# Altium PCB PassStat.PcbDoc
Units mil, origin at the board's own origin, x right, y up, seen from the top; angles counter-clockwise.
Board outline 2750 x 3300 mil, 2 copper layers (Top Layer, Bottom Layer); 68 components, 82 nets, 317 pads, 205 vias.
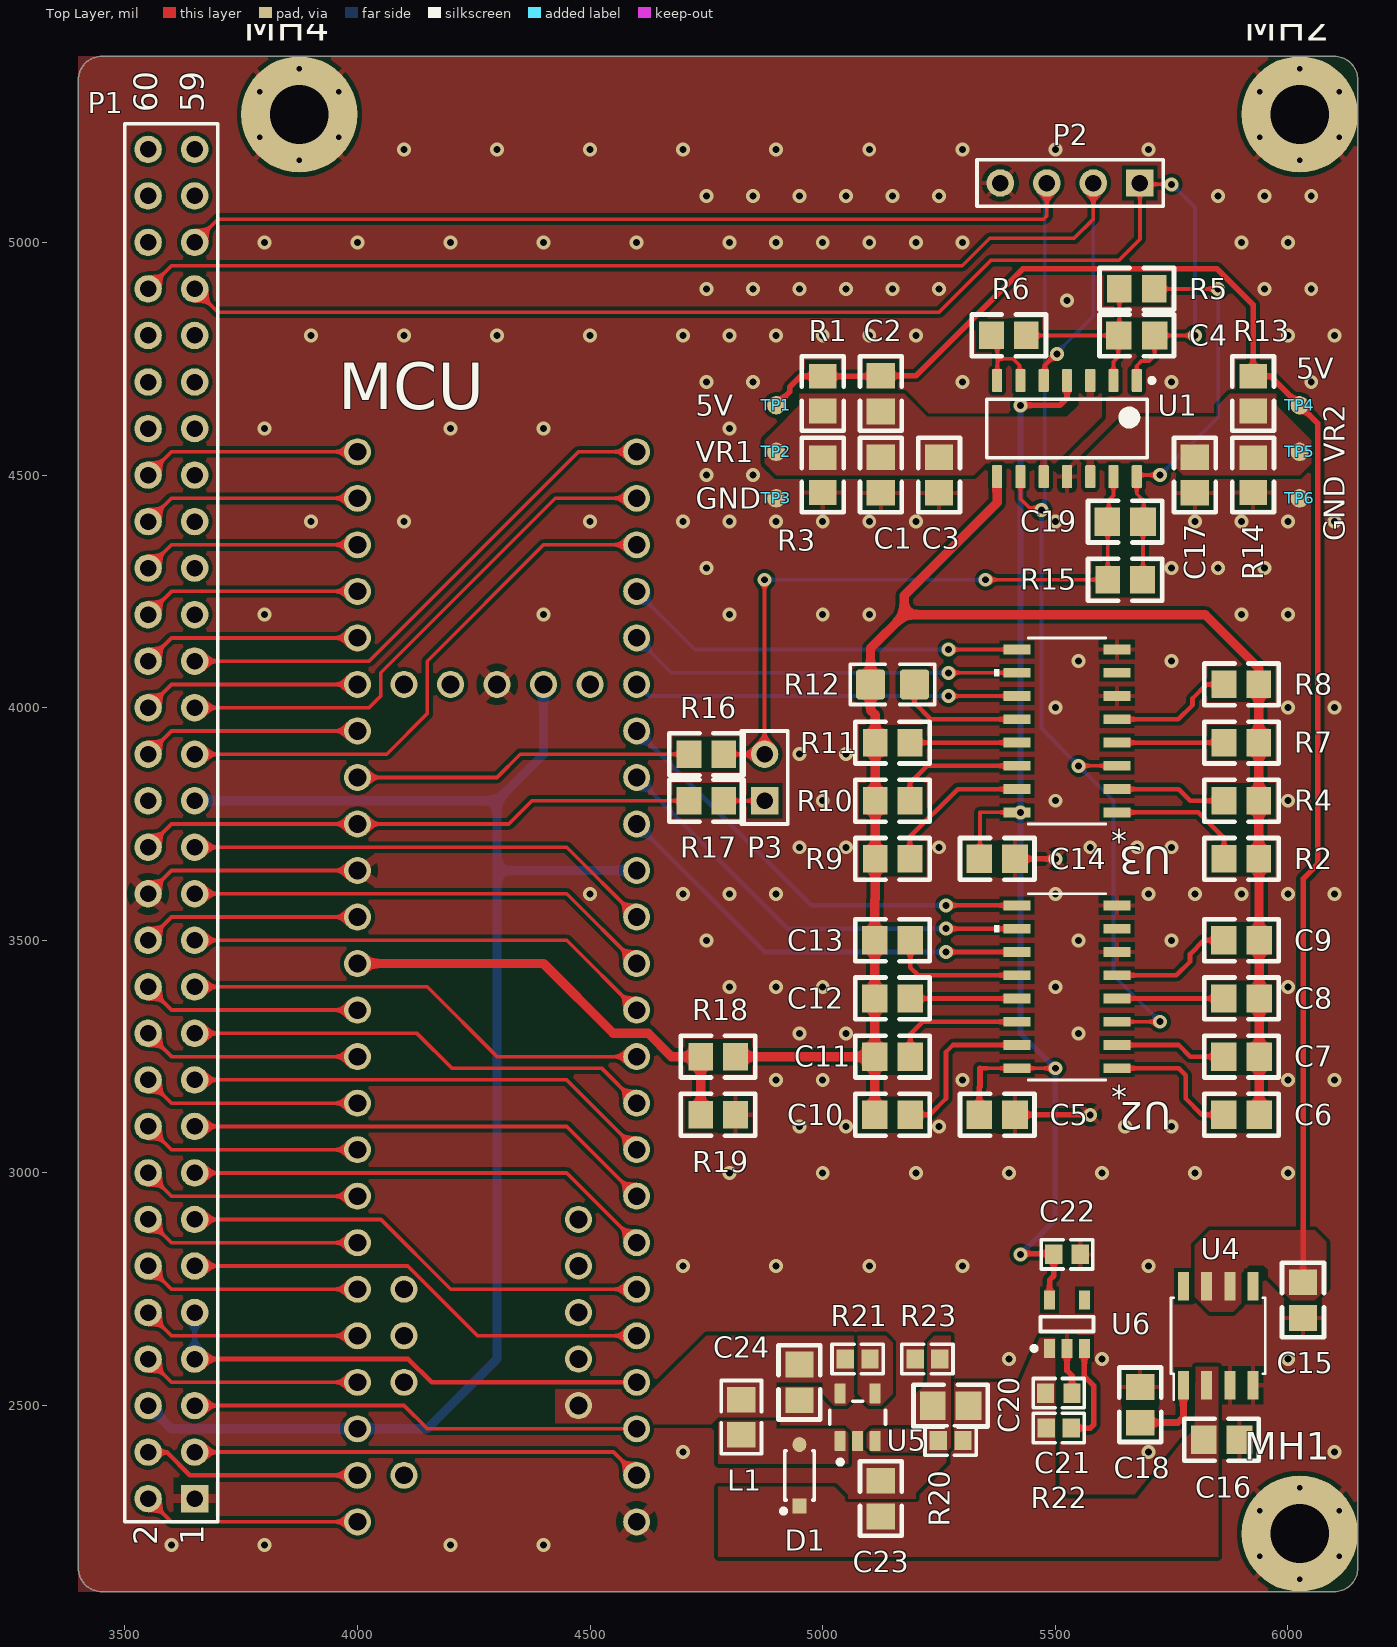
[diagram p0: Top Layer view]
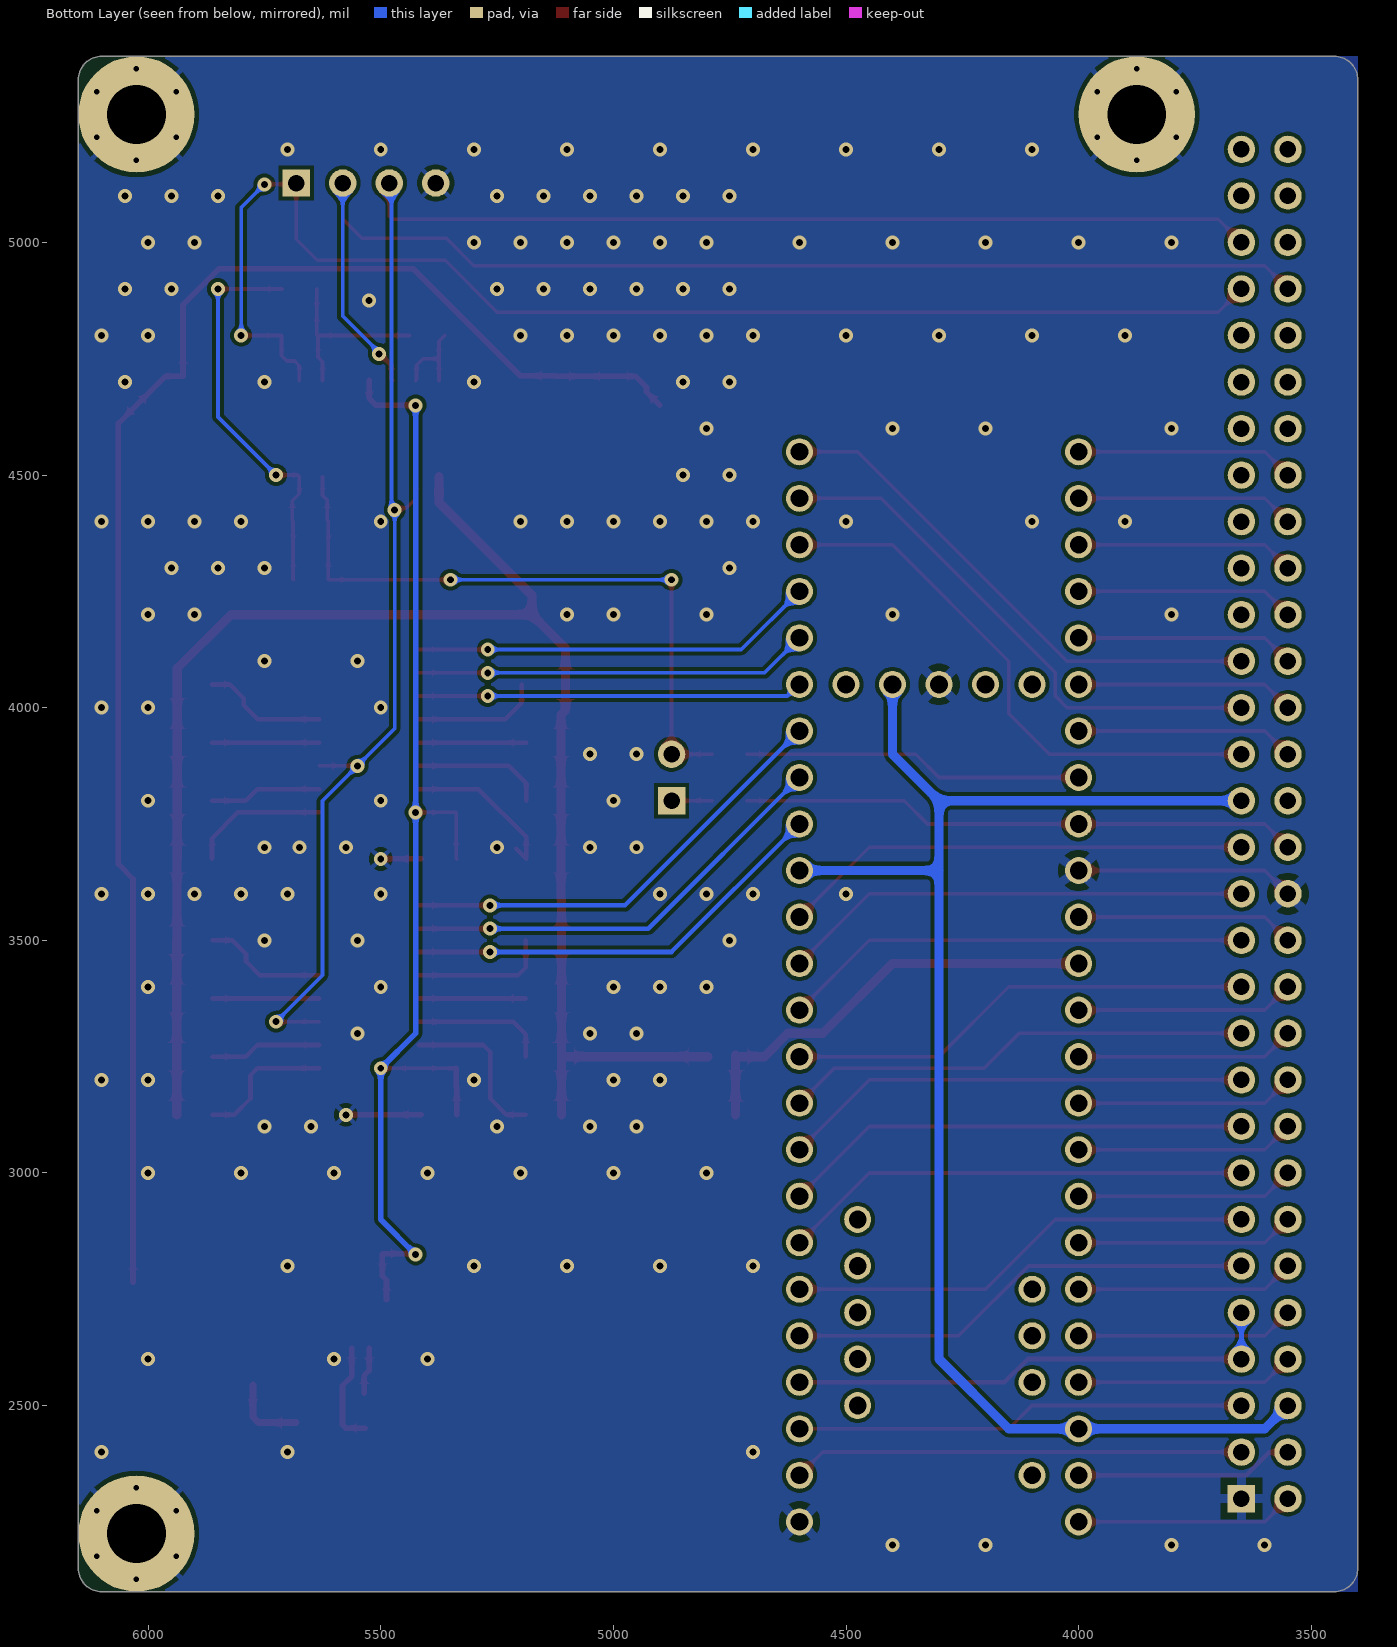
[diagram p1: Bottom Layer view, seen from below]
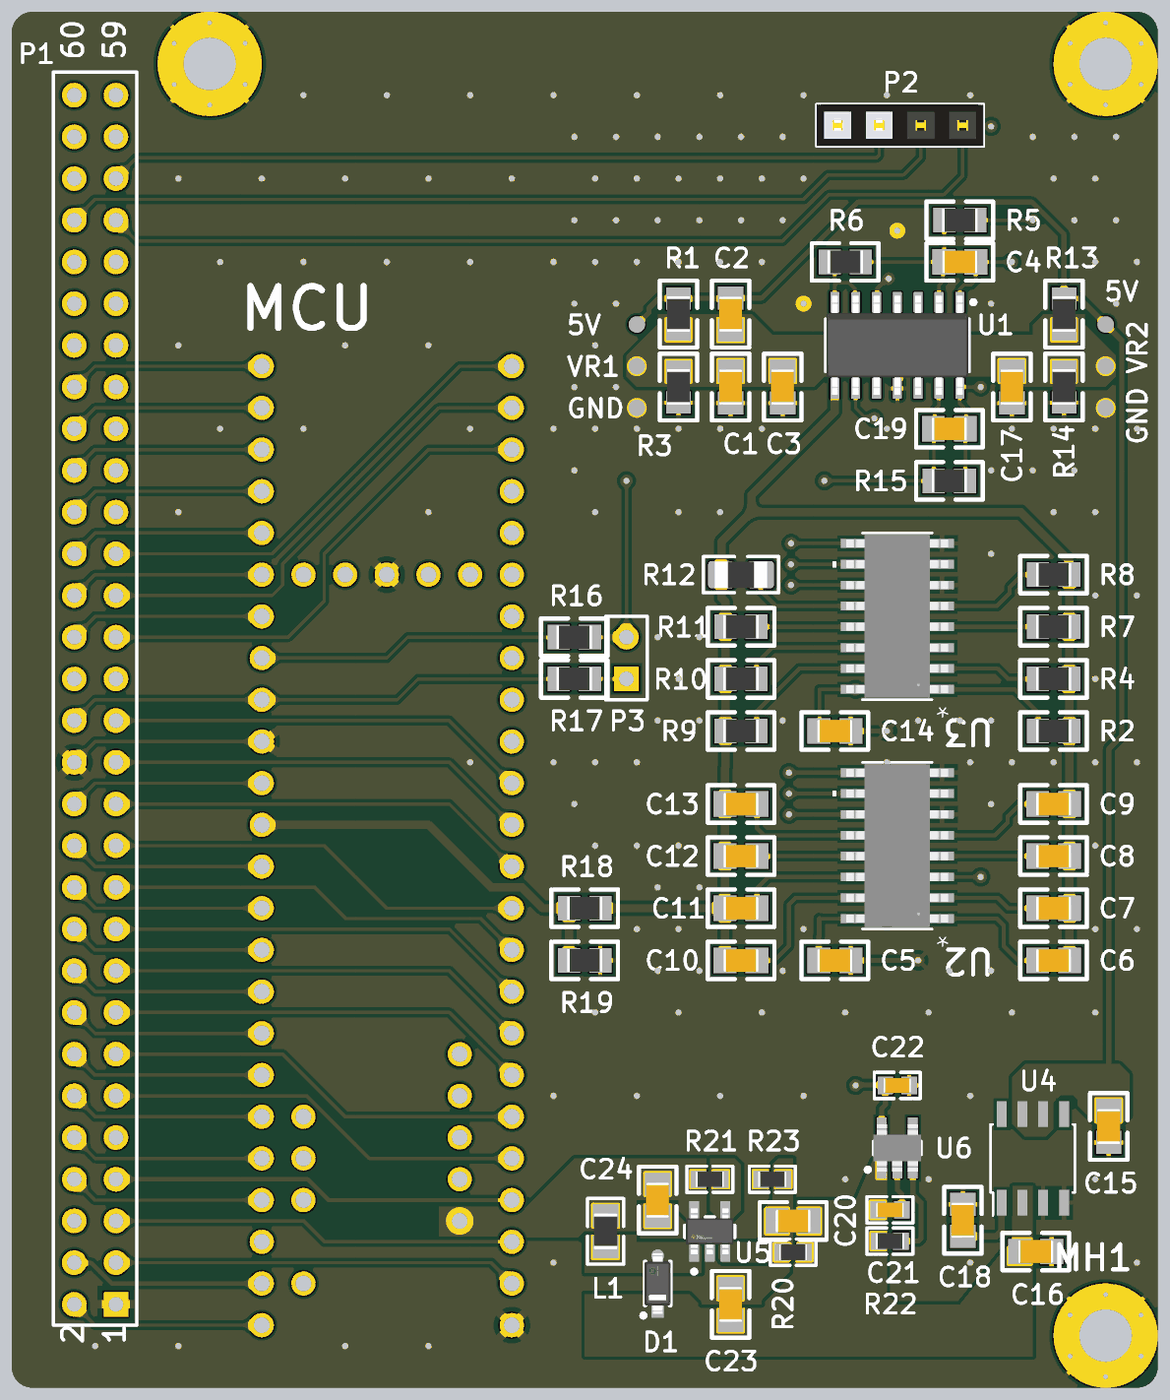
[diagram p2: 3D render of the assembled board from above, using the file's embedded part models]

## Layer stack, top to bottom
Top Solder: solder mask 0.4, Solder Resist, Dk 3.5
Top Layer: signal copper 1.4
Dielectric 1: dielectric 12.6, FR-4, Dk 4.8
Bottom Layer: signal copper 1.4
Bottom Solder: solder mask 0.4, Solder Resist, Dk 3.5

## Board outline
3400,2150 ccw(c3450,2150) 3450,2100 6100,2100 ccw(c6100,2150) 6150,2150 6150,5350 ccw(c6100,5350) 6100,5400 3450,5400 ccw(c3450,5350) 3400,5350

## Design rules (kind name [scope] priority, off if disabled: settings)
Clearance [All] p1: gap=8 ignorepadtopadclearanceinfootprint=FALSE
HoleSize [All] p1: absolutevalues=TRUE maxlimit=100 minlimit=6 maxpercent=80.000 minpercent=20.000
PolygonConnect [All] p1: connectstyle=Relief reliefconductorwidth=10 reliefentries=4 polygonreliefangle="90 Angle" conductorbypadedge=TRUE mindistance=15 enablemindistance=FALSE airgapwidth=10
RoutingVias [All] p1: holewidth=15 width=30 viastyle="Through Hole" minholewidth=10 minwidth=20 maxholewidth=28 maxwidth=50
SMDEntry [All] p1: side=TRUE corner=TRUE anyangle=FALSE
SolderMaskExpansion [All] p1: expansion=4 istentingtop=FALSE
Width [All] p1: maxlimit=250 minlimit=6 preferedwidth=8
29 further rules are at their usual default settings.

## Components (designator, comment, footprint, x,y, rotation, side; value= is the part's Value field where it differs from the comment)
C1 "Capacitor" C0805A 5125,4500 r90 top value=47uF
C2 "Capacitor" C0805A 5125,4675 r90 top value=1u
C3 "Capacitor" C0805A 5250,4500 r90 top value=1u
C4 "Capacitor" C0805A 5675,4800 r0 top value=100p
C5 "Capacitor" C0805A 5375,3125 r180 top value=100n
C6 "Capacitor" C0805A 5900,3125 r0 top value=100n
C7 "Capacitor" C0805A 5900,3250 r0 top value=50n
C8 "Capacitor" C0805A 5900,3375 r0 top value=1n
C9 "Capacitor" C0805A 5900,3500 r0 top value=200p
C10 "Capacitor" C0805A 5150,3125 r180 top value=100p
C11 "Capacitor" C0805A 5150,3250 r180 top value=50p
C12 "Capacitor" C0805A 5150,3375 r180 top value=20p
C13 "Capacitor" C0805A 5150,3500 r180 top value=2p
C14 "Capacitor" C0805A 5375,3675 r180 top value=100n
C15 "Capacitor" C0805A 6032.26,2726.66 r90 top value=1u
C16 "Capacitor" C0805A 5857.26,2426.66 r180 top value=4.7u
C17 "Capacitor" C0805A 5800,4500 r90 top value=47uF
C18 "Capacitor" C0805A 5682.26,2501.66 r270 top value=100n
C19 "Capacitor" C0805A 5650,4400 r180 top value=470p
C20 "Capacitor" C0805A 5275,2500 r180 top value=500p
C21 "Capacitor" C0603A 5507.26,2526.66 r180 top value=1uF
C22 "Capacitor" C0603A 5525,2825 r180 top value=1uF
C23 "Capacitor" C0805A 5125,2300 r270 top value=10u
C24 "Capacitor" C0805A 4950,2550 r90 top value=2.2u
D1 "MBR0520LT1G" FP-425-04-IPC_C 4950,2350 r90 top
L1 "2.2uH" L0805A 4825,2475 r270 top value=2.2u
MCU "TEENSY_3.5/3.6" TEENSY_3.5/3.6 4300,3350 r90 top locked
MH1 "PTHV6" "PTHV6 4-40 Tight" 6025,2225 r0 top net-tie
MH2 "PTHV6" "PTHV6 4-40 Tight" 6025,5275 r0 top net-tie
MH4 "PTHV6" "PTHV6 4-40 Tight" 3875,5275 r0 top net-tie
P1 "Header 30X2" HDR2X30 3650,2300 r90 top
P2 "Header 4" HDR1X4 5681.69,5127.73 r180 top
P3 "jumper" HDR1X2 4875,3800 r90 top
R1 "Resistor" R0805A 5000,4675 r90 top value=1k
R2 "Resistor" R0805A 5900,3675 r0 top value=1k
R3 "Resistor" R0805A 5000,4500 r90 top value=1k
R4 "Resistor" R0805A 5900,3800 r0 top value=10k
R5 "Resistor" R0805A 5675,4900 r180 top value=10k
R6 "Resistor" R0805A 5400,4800 r180 top value=10k
R7 "Resistor" R0805A 5900,3925 r0 top value=100k
R8 "Resistor" R0805A 5900,4050 r0 top value=1M
R9 "Resistor" R0805A 5150,3675 r180 top value=10M
R10 "Resistor" R0805A 5150,3800 r180 top value=30M
R11 "Resistor" R0805A 5150,3925 r180 top value=100M
R12 "Resistor" R1206A 5150,4050 r180 top value=1G
R13 "Resistor" R0805A 5925,4675 r90 top value=1.5k
R14 "Resistor" R0805A 5925,4500 r90 top value=1k
R15 "Resistor" R0805A 5650,4275 r180 top value=15k
R16 "Resistor" R0805A 4750,3900 r180 top value=10k
R17 "Resistor" R0805A 4750,3800 r180 top value=10k
R18 "Resistor" R0805A 4775,3250 r180 top value=501
R19 "Resistor" R0805A 4775,3125 r0 top value=1k
R20 "Resistor" R0603A 5275,2425 r0 top value=47k
R21 "Resistor" R0603A 5075,2600 r180 top value=1k
R22 "Resistor" R0603A 5507.26,2451.66 r0 top value=1k
R23 "Resistor" R0603A 5225,2600 r0 top value=13.3k
TP1 "Test Point" TP-SMT-1mm 4900,4650 r90 top
TP2 "Test Point" TP-SMT-1mm 4900,4550 r90 top
TP3 "Test Point" TP-SMT-1mm 4900,4450 r90 top
TP4 "Test Point" TP-SMT-1mm 6025,4650 r90 top
TP5 "Test Point" TP-SMT-1mm 6025,4550 r90 top
TP6 "Test Point" TP-SMT-1mm 6025,4450 r90 top
U1 "LMC6484AIM/NOPB" D0014A_L 5525,4600 r270 top
U2 "max4617cse+T" 21-0041_S16+1_MXM 5525,3400 r180 top
U3 "max4617cse+T" 21-0041_S16+1_MXM 5525,3950 r180 top
U4 "MAX6126AASA50+" SOIC-8_3.9x4.9mm_Pitch1.27mm 5850,2650 r90 top value=MAX6126
U5 "LMR62014XMFX/NOPB" FP-DBV0005A-MFG 5075,2475 r90 top
U6 "SPX5205M5-L-5-0" SOT95P280X145-5N 5525,2675 r90 top

## Footprints (in the part's own frame and the unit in brackets; to place one, negate y for a bottom-side part, rotate by r counter-clockwise, add the part's x,y. Pads: shape width x height; smd on the part's side, far side on the other; paste and mask are expansions set on the pad)
21-0041_S16+1_MXM [mil]
  rect 57.55x21 smd paste+0 mask+0: 1(-107.27,175) 2(-107.27,125) 3(-107.27,75) 4(-107.27,25) 5(-107.27,-25) 6(-107.27,-75) 7(-107.27,-125) 8(-107.27,-175) 9(107.27,-175) 10(107.27,-125) 11(107.27,-75) 12(107.27,-25) 13(107.27,25) 14(107.27,75) 15(107.27,125) 16(107.27,175)
  silkscreen extent -84,-200 156,200, body extent -122,-195 122,195, height 69
C0603A [mm] "Chip Capacitor, 2-Leads, Body 1.60x0.80mm, IPC Low Density"
  rect 0.95x1.05 smd: 1(-0.725,0) 2(0.725,0)
  silkscreen extent -1.4,-0.8 1.4,0.8, body extent -0.85,-0.45 0.85,0.45, height 0.9
C0805A [mm] "0805 Capacitor"
  rect 1.4x1.55 smd: 1(-0.975,0) 2(0.975,0)
  silkscreen extent -2.03,-1.14 2.03,1.14, body extent -1.07,-0.7 1.07,0.7, height 0.65
D0014A_L [mm] "SOIC, 14-Leads, Body 8.75x4mm, Pitch 1.27mm, IPC High Density"
  rrect18% 1.25x0.55 smd: 1(-2.625,3.81) 2(-2.625,2.54) 3(-2.625,1.27) 4(-2.625,0) 5(-2.625,-1.27) 6(-2.625,-2.54) 7(-2.625,-3.81) 8(2.625,-3.81) 9(2.625,-2.54) 10(2.625,-1.27) 11(2.625,0) 12(2.625,1.27) 13(2.625,2.54) 14(2.625,3.81)
  silkscreen extent -2.75,-4.37 1.6,4.76, body extent -3.02,-4.32 3.02,4.32, height 1.59
FP-425-04-IPC_C [mm]
  rect 0.808x0.742 smd paste+0 mask+0: 1(-1.68,0)
  rrect100% 0.808x0.742 smd paste+0 mask+0: 2(1.68,0)
  silkscreen extent -2.07,-0.8 1.35,1, body extent -2.18,-0.9 2.18,0.9, height 0.25
FP-DBV0005A-MFG [mm]
  rrect17% 1.1x0.6 smd paste+0 mask+0: 1(-1.3,0.95) 2(-1.3,0) 3(-1.3,-0.95) 4(1.3,-0.95) 5(1.3,0.95)
  silkscreen extent -2.57,-1.53 0.87,1.53, body extent -1.95,-1.78 1.95,1.78, height 0.25
HDR1X2 [mm] "Connector; Header; 2 Position"
  rect 1.5x1.5 hole 0.9: 1(0,0)
  round 1.5 hole 0.9: 2(2.54,0)
  silkscreen extent -1.27,-1.27 3.81,1.27
HDR1X4 [mm] "Connector; Header; 4 Position"
  rect 1.5x1.5 hole 0.9: 1(0,0)
  round 1.5 hole 0.9: 2(2.54,0) 3(5.08,0) 4(7.62,0)
  silkscreen extent -1.27,-1.27 8.89,1.27, body extent -1.27,-1.27 8.89,1.27, height 8.48
HDR2X30 [mm] "Connector; Header; 30x2 Position"
  rect 1.5x1.5 hole 0.9: 1(0,0)
  round 1.5 hole 0.9: 2(0,2.54) 3(2.54,0) 4(2.54,2.54) 5(5.08,0) 6(5.08,2.54) 7(7.62,0) 8(7.62,2.54) 9(10.16,0) 10(10.16,2.54) 11(12.7,0) 12(12.7,2.54) 13(15.24,0) 14(15.24,2.54) 15(17.78,0) 16(17.78,2.54) 17(20.32,0) 18(20.32,2.54) 19(22.86,0) 20(22.86,2.54) 21(25.4,0) 22(25.4,2.54) 23(27.94,0) 24(27.94,2.54) 25(30.48,0) 26(30.48,2.54) 27(33.02,0) 28(33.02,2.54) 29(35.56,0) 30(35.56,2.54) 31(38.1,0) 32(38.1,2.54) 33(40.64,0) 34(40.64,2.54) 35(43.18,0) 36(43.18,2.54) 37(45.72,0) 38(45.72,2.54) 39(48.26,0) 40(48.26,2.54) 41(50.8,0) 42(50.8,2.54) 43(53.34,0) 44(53.34,2.54) 45(55.88,0) 46(55.88,2.54) 47(58.42,0) 48(58.42,2.54) 49(60.96,0) 50(60.96,2.54) 51(63.5,0) 52(63.5,2.54) 53(66.04,0) 54(66.04,2.54) 55(68.58,0) 56(68.58,2.54) 57(71.12,0) 58(71.12,2.54) 59(73.66,0) 60(73.66,2.54)
  silkscreen extent -1.27,-1.27 75.06,3.81
L0805A [mm] "Chip Inductor, 0805, IPC Low Density"
  rect 1.39x1.57 smd: 1(-0.955,0) 2(0.955,0)
  silkscreen extent -2,-1.1 2,1.1, body extent -1.1,-0.72 1.1,0.72, height 1.45
"PTHV6 4-40 Tight" [mm] "4-40 plated mounting hole with 6 peripheral vias. 0.25in OD, 0.12in ID. Won't fit washers, may not fit some screws or standoffs"
  round 6.35 hole 3.2: 1(0,0)
  round 0.6 hole 0.3: 2(0,2.5) 3(-2.165,1.25) 4(-2.165,-1.25) 5(0,-2.5) 6(2.165,-1.25) 7(2.165,1.25)
R0603A [mm] "Chip Resistor, 2-Leads, Body 1.55x0.80mm, IPC Low Density"
  rect 0.95x1.05 smd: 1(-0.675,0) 2(0.675,0)
  silkscreen extent -1.4,-0.8 1.4,0.8, body extent -0.85,-0.48 0.85,0.48, height 0.55
R0805A [mm] "0805 Chip Resistor, Body 2.00x1.25mm, IPC Low Density"
  rect 1.35x1.5 smd: 1(-0.95,0) 2(0.95,0)
  silkscreen extent -2.03,-1.14 2.03,1.14, body extent -1.07,-0.7 1.07,0.7, height 0.65
R1206A [mm] "Chip Resistor, 2-Leads, Body 3.20x1.60mm, IPC Low Density"
  rrect25% 1.6x1.65 smd: 1(-1.2,0) 2(1.2,0)
  silkscreen extent -2.3,-1.1 2.3,1.1, body extent -1.6,-0.8 1.6,0.8, height 0.55
SOIC-8_3.9x4.9mm_Pitch1.27mm [mm]
  rect 1.55x0.6 smd mask+0: 1(-2.7,1.905) 2(-2.7,0.635) 3(-2.7,-0.635) 4(-2.7,-1.905) 5(2.7,-1.905) 6(2.7,-0.635) 7(2.7,0.635) 8(2.7,1.905)
  silkscreen extent -3.47,-2.58 2.07,2.58
SOT95P280X145-5N [mm] "SOT23, 5-Leads, Body 2.90x2.80mm, Pitch 0.95mm, IPC Medium Density"
  rect 1.05x0.6 smd: 1(-1.325,0.95) 2(-1.325,0) 3(-1.325,-0.95) 4(1.325,-0.95) 5(1.325,0.95)
  silkscreen extent -1.45,-1.45 0.4,1.92, body extent -1.44,-1.45 1.44,1.45, height 1.45
TEENSY_3.5/3.6 [mil]
  round 58 hole 38: 0/RX(-1000,-300) 1/TX(-900,-300) 2(-800,-300) 3/CANTX(-700,-300) 3V3(300,-300) 3V3_2(700,-100) 3V3_LO(-900,300) 4/CANRX(-600,-300) 5(-500,-300) 6(-400,-300) 7(-300,-300) 8(-200,-300) 9/CS(-100,-300) 10/CS(0,-300) 11/MOSI(100,-300) 12/MISO(200,-300) 13/SCK(200,300) 14/A0(100,300) 15/A1(0,300) 16/A2(-100,300) 17/A3(-200,300) 18/A4/SDA(-300,300) 19/A5/SCL(-400,300) 20/A6(-500,300) 21/A7(-600,300) 21/DAC0(500,300) 22/A8(-700,300) 23/A9(-800,300) 24(400,-300) 25(500,-300) 26(600,-300) 27(700,-300) 28(800,-300) 29(900,-300) 30(1000,-300) 31/A12(1100,-300) 32/A13(1200,-300) 33/A14(1200,300) 34/A15(1100,300) 35/A16(1000,300) 36/A17(900,300) 37/A18(800,300) 38/A19(700,300) 39/A20(600,300) A10(-700,200) A11(-600,200) A22/DAC1(400,300) AGND(-1000,300) AREF(-800,200) GND(-1100,-300) GND2(300,300) GND3(700,0) PROG(700,100) RESET(700,200) U5V(-850,-175) UD+(-650,-175) UD-(-750,-175) UGND1(-550,-175) UGND2(-450,-175) VBAT(700,-200) VIN(-1100,300) VUSB(-1000,200)
TP-SMT-1mm [mm] "1mm diameter test point pad"
  round 1 smd: 1(0,0)

## Part data
C1 C2 C3 C4 C5 C6 C7 C8 C9 C10 C11 C12 C13 C14 C15 C16 C17 C18 C19 C20 C21 C22 C23 C24: library part CMP-001-00000-10, "Non-polarized capacitor"
D1: library part CMP-1055-00425-2, "DIODE SCHOTTKY 20V 500MA SOD123", Average Rectified Current=500mA, Case/Package=SOD-123-2, Forward Voltage=385mV, Max Forward Surge Current (Ifsm)=5.5A, Max Operating Temperature=125°C, Max Repetitive Reverse Voltage (Vrrm)=20V, Max Reverse Leakage Current=250uA, Min Operating Temperature=-65°C, Package Quantity=3000, Contact Plating=Tin, Current Rating=500mA, Element Configuration=Single, Forward Current=500mA, Height=1.12mm, Lead Free="Lead Free", Length=2.69mm, Max Reverse Voltage (DC)=20V, Max Surge Current=5.5A, Number of Pins=2, Output Current=500mA, Packaging="Tape and Reel", Peak Non-Repetitive Surge Current=5.5A, Peak Reverse Current=250uA, Polarity=Standard, Radiation Hardening=No, REACH SVHC="No SVHC", Termination=SMD/SMT, Voltage Rating (DC)=20V, Width=1.6mm
L1: library part CMP-006-00000-4, "Inductor, air coil"
MCU: library part CMP-002-0004-1, Design Item ID=TEENSY_3.5/3.6, DeviceSetName=TEENSY_3.5/3.6, GateName_1=G$1, LibraryName=Teensy356, Package=TEENSY_3.5/3.6, Source=Teensy356.SCHLIB, SymbolName_1=TEENSY_3.5/3.6
MH1 MH2 MH4: library part CMP-00028-00001-9, "Plated mounting hole with 6 peripheral vias. This is a generic symbol that groups all relevant footprints."
P1: library part CMP-005-000092-1, "Header, 30-Pin, Dual row", Component Type=Standard, Design Item ID="Header 30X2", LatestRevisionDate=17-Jul-2002, LatestRevisionNote="Re-released for DXP Platform.", Pin Count=60, Publisher="Altium Limited", Source="Miscellaneous Connectors.SchLib"
P2: library part CMP-005-000097-2, "Header, 4-Pin", Component Type=Standard, Design Item ID="Header 4", LatestRevisionDate=17-Jul-2002, LatestRevisionNote="Re-released for DXP Platform.", Pin Count=4, Publisher="Altium Limited", Source="Miscellaneous Connectors.SchLib"
P3: library part CMP-005-000070-1, "Header, 2-Pin", Component Type=Standard, Design Item ID="Header 2", LatestRevisionDate=17-Jul-2002, LatestRevisionNote="Re-released for DXP Platform.", Pin Count=2, Publisher="Altium Limited", Source="Miscellaneous Connectors.SchLib"
R1 R3 R13 R14 R15: library part CMP-009-00002-14, Tolerance=0.1%
R2 R4 R7 R8 R9 R10 R11 R12 R16 R17: library part CMP-009-00002-14, Tolerance=1%
R5 R6 R18 R19 R20 R21 R22 R23: library part CMP-009-00002-14
TP1 TP2 TP3 TP4 TP5 TP6: library part CMP-002-00006-5, "In circuit test point for a net"
U1: library part CMP-0055-00819-3, "CMOS Quad Rail to Rail Input and Output Operational Amplifier, 14-pin Narrow SOIC, Pb-Free", Manufacturer="Texas Instruments", Package Reference=D0014A, PackageTopMarking=NSUZXYTTE#*LMC6484*AIM, PowerWise=N, Code_IPC=SOIC127P600-14, Code_JEDEC=MS-012AB, ComponentLink1Description="Datasheet URL", ComponentLink1URL=http://www.ti.com/general/docs/lit/getliterature.tsp?genericPartNumber=LMC6484&fileType=pdf, CompType=Amplifiers, PackageDescription="Molded Package S.O., .150in Wide, 14 Lead", PinCount=14, RoHS=Y
U2 U3: library part CMP-002-000033-1, "No Description Available", Mfr_Name="Analog Devices Inc", Design Item ID=max4617cse+T, RefDes=RefDes, Source=max4617cse&plus_T.SchLib, Type=Type
U4: library part MAX6126, "Three Terminal Voltage Reference, 1 Output, 5V, BICMOS, PDSO8", Case/Package=SOP, Manufacturer=Maxim, Max Operating Temperature=125°C, Max Output Voltage=5.001V, Max Supply Voltage=12.6V, Min Operating Temperature=-40°C, Min Output Voltage=4.999V, Min Supply Voltage=5.2V, Nominal Output Voltage=5V, Nominal Supply Voltage=5.5V, Package Body Material=Plastic, Package Equivalence Code=SOP8,.25, Package Shape=Rectangular, Package Style="SMALL OUTLINEMeter", Peak Reflow Temperature (Cel)=260°C, Supplier Part Number=MAX6126AASA50+-ND, Temp Coef of Voltage-Max=5ppm/°C, Temperature Grade=AUTOMOTIVE, Category="Voltage References", Channels=1, ComponentLink1Description=https://datasheet.ciiva.com:443/pdfs/VipMasterIC/IC/MAXM/MAXM-S-A0002891914/MAXM-S-A0002891914-1.pdf?src-supplier=IHS+Markit, ComponentLink1URL=https://datasheet.ciiva.com:443/pdfs/VipMasterIC/IC/MAXM/MAXM-S-A0002891914/MAXM-S-A0002891914-1.pdf?src-supplier=IHS+Markit, ComponentLink2Description=https://datasheet.ciiva.com/22828/0900766b810958c3-22828415.pdf?src-supplier=Rs, ComponentLink2URL=https://datasheet.ciiva.com/22828/0900766b810958c3-22828415.pdf?src-supplier=Rs, ComponentLink3Description=https://datasheet.ciiva.com/2008/max6126-2008873.pdf?src-supplier=Digi-Key, ComponentLink3URL=https://datasheet.ciiva.com/2008/max6126-2008873.pdf?src-supplier=Digi-Key, ComponentLink4Description=https://datasheet.ciiva.com/3236/max6126-3236171.pdf?src-supplier=Avnet, ComponentLink4URL=https://datasheet.ciiva.com/3236/max6126-3236171.pdf?src-supplier=Avnet, ComponentLink5Description=https://datasheet.ciiva.com/14198/max6126-14198970.pdf?src-supplier=Avnet, ComponentLink5URL=https://datasheet.ciiva.com/14198/max6126-14198970.pdf?src-supplier=Avnet, Height - Seated (Max)=1.75mm, JESD-30 Code=R-PDSO-G8, JESD-609 Code=e3, Length=4.9mm, Manufacturer Part Number=MAX6126AASA50+, MFN="Maxim Integrated", MFP=MAX6126AASA30+, Moisture Sensitivity Level=1, Number of Outputs=1, Pins=8, Pricing="1=11.35, 10=10.256, 25=9.7784, 100=8.4906, 250=8.109, 500=7.3935, 1000=7.155 (USD)", Qualification Status="Not Qualified", Reach SVHC Compliant=Yes, RoHS=Yes, RoHS Compliant=Yes, Stock=569, Supplier=Mouser, Surface Mount=Yes, Technology=BICMOS, Terminal Finish=Tin, Terminal Form="Gull Wing", Terminal Pitch=1.27mm, Terminal Position=DUAL, Throw Configuration="THREE TERMINAL VOLTAGE REFERENCE", Trim/Adjustable Output=No, Width=3.9mm
U5: library part CMP-04918-000185-1, "IC REG BOOST ADJ 2A SOT23-5", Case/Package=SOT-23-5, Max Input Voltage=14V, Max Operating Temperature=125°C, Max Output current=1.4A, Max Output Voltage=20V, Min Input Voltage=2.7V, Min Operating Temperature=-40°C, Min Output Voltage=3V, Output Current=1.8A, Package Quantity=3000, Quiescent Current=2mA, Switching Frequency=1.6MHz, Contact Plating=Tin, Lead Free="Lead Free", Mount="Surface Mount", Number of Outputs=1, Number of Pins=5, Output Configuration=Positive, Output Type=Adjustable, Output Voltage=20V, Packaging="Tape and Reel", Radiation Hardening=No, Series="SIMPLE SWITCHER®", Synchronous Rectifier=No, Topology=Boost
U6: library part CMP-019-00031-2, "Fixed Positive LDO Regulator, 5V, 0.35V Dropout, BIPolar, PDSO5", Case/Package=LSSOP, Max Supply Voltage=16V, Pins=5, RoHS Compliant=Yes

## Via types
v1: diameter 30, hole 15, Top Layer to Bottom Layer, tented both sides, 203 vias
v2: diameter 30, hole 15, Top Layer to Bottom Layer, 2 vias

## Nets (pads, with @x,y where several pads share a name; then routed paths per layer and width w, separated by ;. In a path a pad name is that pad's centre, name@x,y a point inside that pad or via, vN(x,y) a via of type N, cw(c..) or ccw(c..) an arc to the next point about the centre after c; other vN are vias at no path point)
0: MCU.0/RX P1.3 | length 970.7
  Top Layer w8: P1.3 4550,2400 MCU.0/RX
1: MCU.1/TX P1.5 | length 970.7
  Top Layer w8: P1.5 4100.24,2500 4150.24,2450 MCU.1/TX
2: MCU.2 P1.7 P1.9 | length 1070.7
  Top Layer w10: P1.7 4109.4,2600 4159.4,2550 MCU.2
  Bottom Layer w10: P1.7 P1.9
3: MCU.3/CANTX P1.11 | length 1012.1
  Top Layer w8: P1.11 4107.98,2800 4257.98,2650 MCU.3/CANTX
4: MCU.4/CANRX P1.13 | length 1012.1
  Top Layer w8: P1.13 4050.24,2900 4200.24,2750 MCU.4/CANRX
5: MCU.5 P1.15 | length 1012.1
  Top Layer w8: P1.15 4450,3000 MCU.5
5Vref: C2.2 C15.2 R1.2 R13.2 TP1.1 TP4.1 U4.6 U4.7 | length 3378.1
  Top Layer w12: TP1.1 4928.85,4678.85 4928.85,4688.78 4952.47,4712.4 R1.2 5124.02,4712.4 C2.2 5200.08,4713.39 5430.22,4943.53 5847.48,4943.53 5925,4866.01 R13.2 5962.6,4712.4 TP4.1 6064,4611 6064,3663.77 6032.43,3632.2 C15.2@6032.43,2765.05
6: MCU.6 P1.17 | length 1012.1
  Top Layer w8: P1.17 4450,3100 MCU.6
7: MCU.7 P1.19 | length 1012.1
  Top Layer w8: P1.19 4450,3200 MCU.7
8: MCU.8 P1.21 | length 1012.1
  Top Layer w8: P1.21 4127.9,3300 4202.62,3225.28 4524.72,3225.28 MCU.8
9: MCU.9/CS P1.23 | length 1012.1
  Top Layer w8: P1.23 4150,3400 4300,3250 MCU.9/CS
10: MCU.10/CS P1.25 | length 1012.1
  Top Layer w8: P1.25 4450,3500 MCU.10/CS
11: MCU.11/MOSI P1.27 | length 1012.1
  Top Layer w8: P1.27 4450,3600 MCU.11/MOSI
12: MCU.12/MISO P1.29 | length 1012.1
  Top Layer w8: P1.29 4450,3700 MCU.12/MISO
13: MCU.13/SCK P1.26 | length 470.7
  Top Layer w8: P1.26 3600,3550 MCU.13/SCK
24: MCU.24 U2.11 | length 931.6
  Top Layer w10: v1(5265,3475) U2.11
  Bottom Layer w10: MCU.24 4875,3475 v1(5265,3475)
25: MCU.25 U2.10 | length 952.3
  Top Layer w10: v1(5265,3525) U2.10
  Bottom Layer w10: MCU.25 4925,3525 v1(5265,3525)
26: MCU.26 U2.9 | length 973.1
  Top Layer w10: v1(5265,3575) U2.9
  Bottom Layer w10: MCU.26 4975,3575 v1(5265,3575)
27: MCU.27 U3.11 | length 828.1
  Top Layer w8: v1(5270,4025) U3.11
  Bottom Layer w8: MCU.27 4601.36,4050 4626.36,4025 v1(5270,4025)
28: MCU.28 U3.10 | length 848.8
  Top Layer w8: v1(5270,4075) U3.10
  Bottom Layer w8: MCU.28 4675,4075 v1(5270,4075)
29: MCU.29 U3.9 | length 869.5
  Top Layer w8: v1(5270,4125) U3.9
  Bottom Layer w8: MCU.29 4725,4125 v1(5270,4125)
30: MCU.30 P1.33 | length 1202.4
  Top Layer w8: P1.33 4062.73,3900 4150,3987.27 4150,4100 4400,4350 MCU.30
31: MCU.31/A12 P1.35 | length 1165.7
  Top Layer w8: P1.35 4025,4000 4050,4025 4050,4075 4425,4450 MCU.31/A12
32: MCU.32/A13 P1.37 | length 1136.4
  Top Layer w8: P1.37 4025,4100 4475,4550 MCU.32/A13
+3.3: MCU.3V3 MCU.3V3_2 MCU.3V3_LO P1.6 P1.31 | length 3274.3
  Bottom Layer w20: P1.6 3600,2450 MCU.3V3_LO 4150,2450 4300,2600 4300,3650 ; P1.31 4300,3800 ; MCU.3V3_2 4400,3900 4300,3800 ; MCU.3V3 4300,3650 ; 4300,3650 4300,3800
+5: C5.2 C14.2 C22.2 U1.4 U2.16 U3.16 U6.5 | length 2653.2
  Top Layer w8: C14.2 5337.99,3676.38 5337.99,3775 U3.16 v1(5425,3775) ; 5337.99,3225 U2.16 v1(5500,3225)
  Top Layer w12: C5.2 5336.61,3183.88 5337.99,3185.26 5337.99,3225 ; v1(5425,2825) 5426.66,2826.66 C22.2@5494.19,2826.66 ; v1(5425,4650) 5510,4650 5525,4665 U1.4 ; U6.5 5487.6,2769.68 5496.46,2778.54 C22.2
  Bottom Layer w12: v1(5425,2825) 5500,2900 v1(5500,3225) 5425,3300 v1(5425,3775) v1(5425,4650)
A0: MCU.14/A0 R18.2 R19.1 | length 948.4
  Top Layer w20: MCU.14/A0 4400,3450 4550,3300 4625,3300 4675,3250 R18.2 ; R19.1 R18.2@4737.6,3252.95
A1: MCU.15/A1 P1.24 | length 470.7
  Top Layer w8: P1.24 3600,3350 MCU.15/A1
A2: MCU.16/A2 P1.22 | length 470.7
  Top Layer w8: P1.22 3600,3250 MCU.16/A2
A3: MCU.17/A3 P1.20 | length 470.7
  Top Layer w8: P1.20 3600,3150 MCU.17/A3
A4: MCU.18/A4/SDA P1.18 | length 470.7
  Top Layer w8: P1.18 3600,3050 MCU.18/A4/SDA
A5: MCU.19/A5/SCL P1.16 | length 470.7
  Top Layer w8: P1.16 3600,2950 MCU.19/A5/SCL
A6: MCU.20/A6 P1.14 | length 470.7
  Top Layer w8: P1.14 3600,2850 MCU.20/A6
A7: MCU.21/A7 P1.12 | length 470.7
  Top Layer w8: P1.12 3600,2750 MCU.21/A7
A8: MCU.22/A8 P1.10 | length 470.7
  Top Layer w8: P1.10 3600,2650 MCU.22/A8
A9: MCU.23/A9 P1.8 | length 470.7
  Top Layer w8: P1.8 3600,2550 MCU.23/A9
A14: MCU.33/A14 P1.46 | length 470.7
  Top Layer w8: P1.46 3600,4550 MCU.33/A14
A15: MCU.34/A15 P1.44 | length 470.7
  Top Layer w8: P1.44 3600,4450 MCU.34/A15
A16: MCU.35/A16 P1.42 | length 470.7
  Top Layer w8: P1.42 3600,4350 MCU.35/A16
A17: MCU.36/A17 P1.40 | length 470.7
  Top Layer w8: P1.40 3600,4250 MCU.36/A17
A18: MCU.37/A18 P1.38 | length 470.7
  Top Layer w8: P1.38 3600,4150 MCU.37/A18
A19: MCU.38/A19 P1.36 | length 470.7
  Top Layer w8: P1.36 3600,4050 MCU.38/A19
A20: MCU.39/A20 P1.34 | length 470.7
  Top Layer w8: P1.34 3600,3950 MCU.39/A20
AGND: MCU.AGND P1.4 | length 470.7
  Top Layer w10: P1.4 3550.67,2399.33 3590.53,2399.33 3639.86,2350 MCU.AGND
BOOST_VOLTAGE: C16.2 C20.1 C21.2 C23.2 D1.1 R20.2 R22.1 U4.2 U6.1
CE: C4.2 P1.53 P2.1 U1.1 | length 2862.5
  Top Layer w8: P1.53 3700,4850 5250,4850 5361.53,4961.53 5636.53,4961.53 5681.69,5006.69 P2.1 5684.42,5125 v1(5750,5125) ; U1.1 5675,4735 5685,4745 5701.77,4745 5713.39,4756.61 C4.2 v1(5800,4800)
  Bottom Layer w8: v1(5750,5125) 5800,5075 v1(5800,4800)
DAC0: MCU.21/DAC0 R16.2 | length 733.3
  Top Layer w8: MCU.21/DAC0 4300,3850 4350,3900 R16.2
DAC1: MCU.A22/DAC1 P1.30 R17.2 | length 1204
  Top Layer w8: P1.30 3600,3750 MCU.A22/DAC1 4325,3750 4375,3800 R17.2
GND: C1.1 C3.1 C5.1 C14.1 C15.1 C16.1 C17.1 C18.1 C21.1 C22.1 C23.1 C24.1 MCU.GND MCU.GND2 MCU.GND3 MH1.1 MH1.2 MH1.3 MH1.4 MH1.5 MH1.6 MH1.7 MH2.1 MH2.2 MH2.3 MH2.4 MH2.5 MH2.6 MH2.7 MH4.1 MH4.2 MH4.3 MH4.4 MH4.5 MH4.6 MH4.7 P1.1 P1.28 P2.4 R3.1 R14.1 R19.2 R23.1 TP3.1 TP6.1 U1.11 U2.6 U2.8 U3.6 U3.8 U4.3 U4.4 U5.2 U6.2 | length 819.6
  Top Layer w8: P1.28 3600,3650 MCU.GND2
  Top Layer w12: C5.1 v1(5575,3125) ; C14.1 v1(5500,3675) ; U6.2 5525,2575 5535.8,2564.2 C21.1
  other v1: 3600,2200 3800,2200 4200,2200 4400,2200 4700,2400 5700,2400 6100,2400 5400,2600 5600,2600 6000,2600 4700,2800 4900,2800 5100,2800 5300,2800 5700,2800 4800,3000 5000,3000 5200,3000 5400,3000 5600,3000 5800,3000 6000,3000 4950,3100 5050,3100 5250,3100 5650,3100 5750,3100 4900,3200 4900,3200 5000,3200 5300,3200 5300,3200 6000,3200 6100,3200 4950,3300 5050,3300 5550,3300 4800,3400 4800,3400 4900,3400 5000,3400 5000,3400 5500,3400 6000,3400 6000,3400 4750,3500 5550,3500 5750,3500 4500,3600 4700,3600 4800,3600 4900,3600 4900,3600 5500,3600 5500,3600 5700,3600 5700,3600 5800,3600 5900,3600 5900,3600 6000,3600 6100,3600 4950,3700 5050,3700 5250,3700 5575,3700 5675,3700 5750,3700 5000,3800 5000,3800 5500,3800 6000,3800 6000,3800 4950,3900 5050,3900 5500,4000 5500,4000 6000,4000 6100,4000 5550,4100 5750,4100 3800,4200 4400,4200 4800,4200 4800,4200 5000,4200 5000,4200 5100,4200 5900,4200 6000,4200 6000,4200 4750,4300 5750,4300 5850,4300 5950,4300 3900,4400 4100,4400 4500,4400 4700,4400 4800,4400 4900,4400 4900,4400 5000,4400 5100,4400 5100,4400 5200,4400 5500,4400 5500,4400 5800,4400 5900,4400 5900,4400 6000,4400 6100,4400 4750,4500 4850,4500 3800,4600 4200,4600 4400,4600 4800,4600 4800,4600 4750,4700 4850,4700 5750,4700 6050,4700 3900,4800 4100,4800 4300,4800 4500,4800 4700,4800 4800,4800 4900,4800 4900,4800 5000,4800 5100,4800 5100,4800 5200,4800 6000,4800 6100,4800 4750,4900 4850,4900 4950,4900 5050,4900 5150,4900 5250,4900 5950,4900 6050,4900 3800,5000 4000,5000 4200,5000 4400,5000 4600,5000 4800,5000 4800,5000 4900,5000 5000,5000 5000,5000 5100,5000 5200,5000 5200,5000 5300,5000 5900,5000 6000,5000 6000,5000 4750,5100 4850,5100 4950,5100 5050,5100 5150,5100 5250,5100 5850,5100 5950,5100 6050,5100 4100,5200 4300,5200 4500,5200 4700,5200 4900,5200 5100,5200 5300,5200 5500,5200 5700,5200
  other v2: 5300,4700 5525,4875
NetC4_1: C4.1 R5.2 R6.1 U1.2 | length 401.1
  Top Layer w8: R6.1 C4.1 ; U1.2 5625,4743.72 5635,4753.72 5635,4798.39 C4.1 ; R5.2 5637.6,4800.98 C4.1
NetC6_1: C6.1 U2.1 | length 300.1
  Top Layer w10: U2.1 5765,3225 5780,3210 5780,3160 5815,3125 C6.1
NetC6_2: C6.2 C7.2 C8.2 C9.2 C10.2 C11.2 C12.2 C13.2 R2.2 R4.2 R7.2 R8.2 R9.2 R10.2 R11.2 R12.2 R18.1 U1.8 | length 3573.4
  Top Layer w20: R18.1@4796.76,3250 R18.1 C11.2 ; C10.2 C11.2 ; R10.2@5112.6,3799.51 R9.2 5112.6,3588.48 5111.61,3587.5 C13.2 C12.2 C11.2 ; R10.2 R11.2 5112.6,3984.53 5102.76,3994.37 R12.2 5102.76,4127.76 5175,4200 ; U1.8 5375,4441.02 5175,4241.02 5175,4200 ; C6.2 C7.2 C8.2 5938.39,3499.51 5937.89,3500 5937.89,3675 5937.4,3675.49 R4.2 R7.2 R8.2 5937.4,4084.53 5821.93,4200 5175,4200
NetC7_1: C7.1 U2.2 | length 239.7
  Top Layer w10: U2.2 5765,3275 5790,3250 C7.1
NetC8_1: C8.1 U2.4 | length 229.3
  Top Layer w10: U2.4 C8.1
NetC9_1: C9.1 U2.5 | length 269.7
  Top Layer w10: U2.5 5760,3425 5789.53,3454.53 5789.53,3470.47 5819.05,3500 C9.1
NetC10_1: C10.1 U2.15 | length 350.1
  Top Layer w10: C10.1 5230,3125 5265,3160 5265,3260 5280,3275 U2.15
NetC11_1: C11.1 U2.14 | length 288.8
  Top Layer w10: C11.1 5188.39,3298.39 5215,3325 U2.14
NetC12_1: C12.1 U2.13 | length 229.3
  Top Layer w10: C12.1 U2.13
NetC13_1: C13.1 U2.12 | length 294.6
  Top Layer w10: C13.1 5188.39,3441.61 5205,3425 U2.12
NetC18_2: C18.2 U4.1 | length 166.3
  Top Layer w15: C18.2 5763.28,2463.28 5775.01,2475.01 U4.1
NetC19_1: C19.1 R5.1 R15.1 U1.14 | length 869.7
  Top Layer w8: R15.1 5688.39,4275.98 C19.1 5690,4401.61 5690,4445 5675,4460 U1.14 5678.35,4500 v1(5725,4500) ; R5.1 v1(5850,4900)
  Bottom Layer w8: v1(5725,4500) 5850,4625 v1(5850,4900)
NetC19_2: C19.2 P3.2 R15.2 R16.1 U1.13 | length 1427.8
  Top Layer w8: R16.1 P3.2 v1(4875,4275) ; v1(5350,4275) R15.2 5612.6,4399.02 C19.2 5615,4403.39 5615,4446.28 5625,4456.28 U1.13
  Bottom Layer w8: v1(4875,4275) v1(5350,4275)
NetC20_2: C20.2 R20.1 R23.2 U5.3
NetD1_2: D1.2 L1.2 U5.1
NetP3_1: P3.1 R17.1 | length 87.6
  Top Layer w8: R17.1 P3.1
NetR2_1: R2.1 U3.1 | length 297.8
  Top Layer w10: U3.1 5807.13,3775 5862.6,3719.53 R2.1
NetR4_1: R4.1 U3.2 | length 240.7
  Top Layer w10: U3.2 5765,3825 5790,3800 R4.1
NetR6_2: R6.2 U1.6 U1.7 | length 189
  Top Layer w8: R6.2 5375,4787.6 5375,4750 ; U1.7 5375,4750 ; U1.6 5423,4705.35 5423,4735.94 5408.94,4750 5375,4750
NetR7_1: R7.1 U3.4 | length 230.3
  Top Layer w10: U3.4 R7.1
NetR8_1: R8.1 U3.5 | length 269.8
  Top Layer w10: U3.5 5764.41,3975 5794.7,4005.3 5794.7,4019.7 5825,4050 R8.1
NetR9_1: R9.1 U3.15 | length 350.7
  Top Layer w10: R9.1@5208.98,3696.57 R9.1 5187.4,3722.4 5290,3825 U3.15
NetR10_1: R10.1 U3.14 | length 283.3
  Top Layer w10: R10.1 5187.4,3837.4 5225,3875 U3.14
NetR11_1: R11.1 U3.13 | length 230.3
  Top Layer w10: R11.1 U3.13
NetR12_1: R12.1 U3.12 | length 274.8
  Top Layer w10: R12.1 5197.24,4010.31 5232.56,3975 U3.12
NetR21_1: R21.1 U5.4
NetR22_2: R22.2 U6.3 | length 223.7
  Top Layer w12: R22.2 5575.23,2451.66 5582.26,2458.69 5582.26,2542.74 5562.4,2562.6 U6.3
RE: P1.54 P2.2 U1.5 | length 2641.7
  Top Layer w8: P1.54 3600,4950 5300,4950 5358.9,5008.9 5540.24,5008.9 5581.69,5050.35 P2.2
  Top Layer w10: U1.5 5477.41,4705.75 5477.41,4736.44 5500.96,4760 v1(5504,4760)
  Bottom Layer w8: v1(5504,4760) 5504,4764 5581.69,4841.69 P2.2
USB_VCC: C24.2 L1.1 MCU.U5V R21.2 U5.5
VIN: MCU.VIN P1.2 | length 480.7
  Top Layer w8: P1.2@3540,2300 P1.2 3600,2250 MCU.VIN
VR1: C1.2 C2.1 C3.2 R1.1 R3.2 TP2.1 U1.3 U1.10
VR2: C17.2 R13.1 R14.2 TP5.1 U1.12
WE: P1.55 P2.3 U1.9 U2.3 U3.3 | length 4116.9
  Top Layer w8: P1.55 3700,5050 5475,5050 5481.69,5056.69 P2.3 ; U1.9 5425,4449.22 5445.01,4429.21 5465.79,4429.21 v1(5470,4425) ; v1(5550,3875) U3.3 ; U2.3 v1(5725,3325)
  Bottom Layer w8: P2.3 5477,5123.03 5477,4437.95 5470,4430.95 5470,3955 v1(5550,3875) 5625,3800 5625,3425 v1(5725,3325)
pads on no net: MCU.A10 MCU.A11 MCU.AREF MCU.PROG MCU.RESET MCU.UD+ MCU.UD- MCU.UGND1 MCU.UGND2 MCU.VBAT MCU.VUSB P1.32 P1.39 P1.41 P1.43 P1.45 P1.47 P1.48 P1.49 P1.50 P1.51 P1.52 P1.56 P1.57 P1.58 P1.59 P1.60 U2.7 U3.7 U4.5 U4.8 U6.4

## Polygon pours and split planes (outlines as drawn)
GND on Top Layer "GND_L01_P020" (solid, remove dead copper, pour order 20): 3400,5400 6150,5400 6150,2100 3400,2100
USB_VCC on Top Layer "USB_VCC_L01_P015" (solid, remove dead copper, pour order 15): 5025,2500 5050,2500 5075,2525 5075,2650 4750,2650 4635,2535 4425,2535 4425,2460 4760,2460 4775,2475 4900,2475 4900,2550 5000,2550 5000,2525
BOOST_VOLTAGE on Top Layer "BOOST_VOLTAGE_L01_P018" (solid, remove dead copper, pour order 18): 5275,2550 5275,2375 5200,2300 5050,2300 5025,2325 4775,2325 4775,2175 5850,2175 5850,2583.87 5802.07,2583.87 5800,2450 5775,2425 5675,2300 5525,2300 5500,2325 5500,2646.18 5466.15,2646.18 5425,2550
5Vref on Top Layer "5VREF_L01_P019" (solid, remove dead copper, pour order 19): 5900,2719.4 5900,2784.4 5917.26,2801.66 5947.26,2801.66 5957.26,2791.66 5957.26,2776.66 6007.26,2726.66 6057.26,2726.66 6082.26,2751.66 6082.26,2851.66 6057.26,2876.66 5832.26,2876.66 5800,2844.4 5800,2733.92 5832.26,2701.66 5882.26,2701.66
VR1 on Top Layer "VR1_L01_P002" (solid, pour order 2): 4900,4500 5325,4500 5350,4525 5450,4525 5450,4450 5500,4450 5500,4525 5600,4625 5600,4750 5550,4750 5550,4650 5525,4625 5225,4625 5175,4675 4950,4675 4950,4650 4900,4600 4875,4575 4875,4525
VR2 on Top Layer "VR2_L01_P003" (solid, pour order 3): 5600,4450 5550,4450 5550,4525 5650,4625 5850,4625 5850,4650 5875,4675 5975,4675 5975,4650 6050,4575 6050,4525 6025,4500 5775,4500 5750,4525 5600,4525
NetD1_2 on Top Layer "NETD1_2_L01_P016" (solid, remove dead copper, pour order 16): 5055,2440 5055,2375 4775,2375 4775,2475 4900,2475 4900,2450 5045,2450
NetR21_1 on Top Layer "NETR21_1_L01_P014" (solid, remove dead copper, pour order 14): 5075,2650 5075,2525 5100,2500 5125,2500 5150,2525 5150,2635 5135,2650
NetC20_2 on Top Layer "NETC20_2_L01_P007" (solid, remove dead copper, pour order 7): 5225,2635 5225,2550 5200,2525 5200,2460 5190,2450 5105,2450 5095,2440 5095,2410 5105,2400 5265,2400 5275,2410 5275,2650 5240,2650
GND on Top Layer "GND_L01_P017" (solid, remove dead copper, pour order 17): 5150,2650 5150,2500 5000,2500 5000,2540 4900,2540 4900,2450 5055,2450 5055,2300 5200,2300 5200,2400 5100,2400 5100,2450 5200,2450 5200,2550 5225,2575 5225,2650
GND on Bottom Layer "GND_L02_P001" (solid, remove dead copper, pour order 1): 3400,5400 6150,5400 6150,2100 3400,2100

## Silkscreen, mask and mechanical layers (free items; w line width, h text height)
Top Overlay:
  text "5V" at 6017.5,4707.51 h45
  text "5V" at 4727.5,4627.51 h45
  text "VR1" at 4727.5,4527.51 h45
  text "VR2" at 6122.49,4527.5 h45 r90
  text "GND" at 4727.5,4427.51 h45
  text "GND" at 6122.49,4357.5 h45 r90
Mechanical 1:
  lines w6: 3400,2150 ccw(c3450,2150) 3450,2100 6100,2100 ccw(c6100,2150) 6150,2150 6150,5350 ccw(c6100,5350) 6100,5400 4500,5400 3450,5400 ccw(c3450,5350) 3400,5350 3400,2150

## Text inside footprints (layer, text, board x,y; h text height)
MCU: Mechanical 7 "TEENSY" at 4256.25,3456.25 h108.5 r90; Mechanical 7 "3.6" at 4343.75,3456.25 h108.5 r90
P1: Top Overlay "60" at 3570,5280 h50 r90; Top Overlay "59" at 3670,5280 h50 r90; Top Overlay "1" at 3670,2200 h50 r90; Top Overlay "2" at 3570,2200 h50 r90; Bottom Overlay "1" at 3670,100 h50 r90
U2: Top Overlay "*" at 5654.77,3209 h50 r180; Mechanical 13 "*" at 5601,3258 h50 r180
U3: Top Overlay "*" at 5654.77,3759 h50 r180; Mechanical 13 "*" at 5601,3808 h50 r180